# EAGLE board FlexOLED-v02 (EAGLE 7.7.0), part 1 of 2
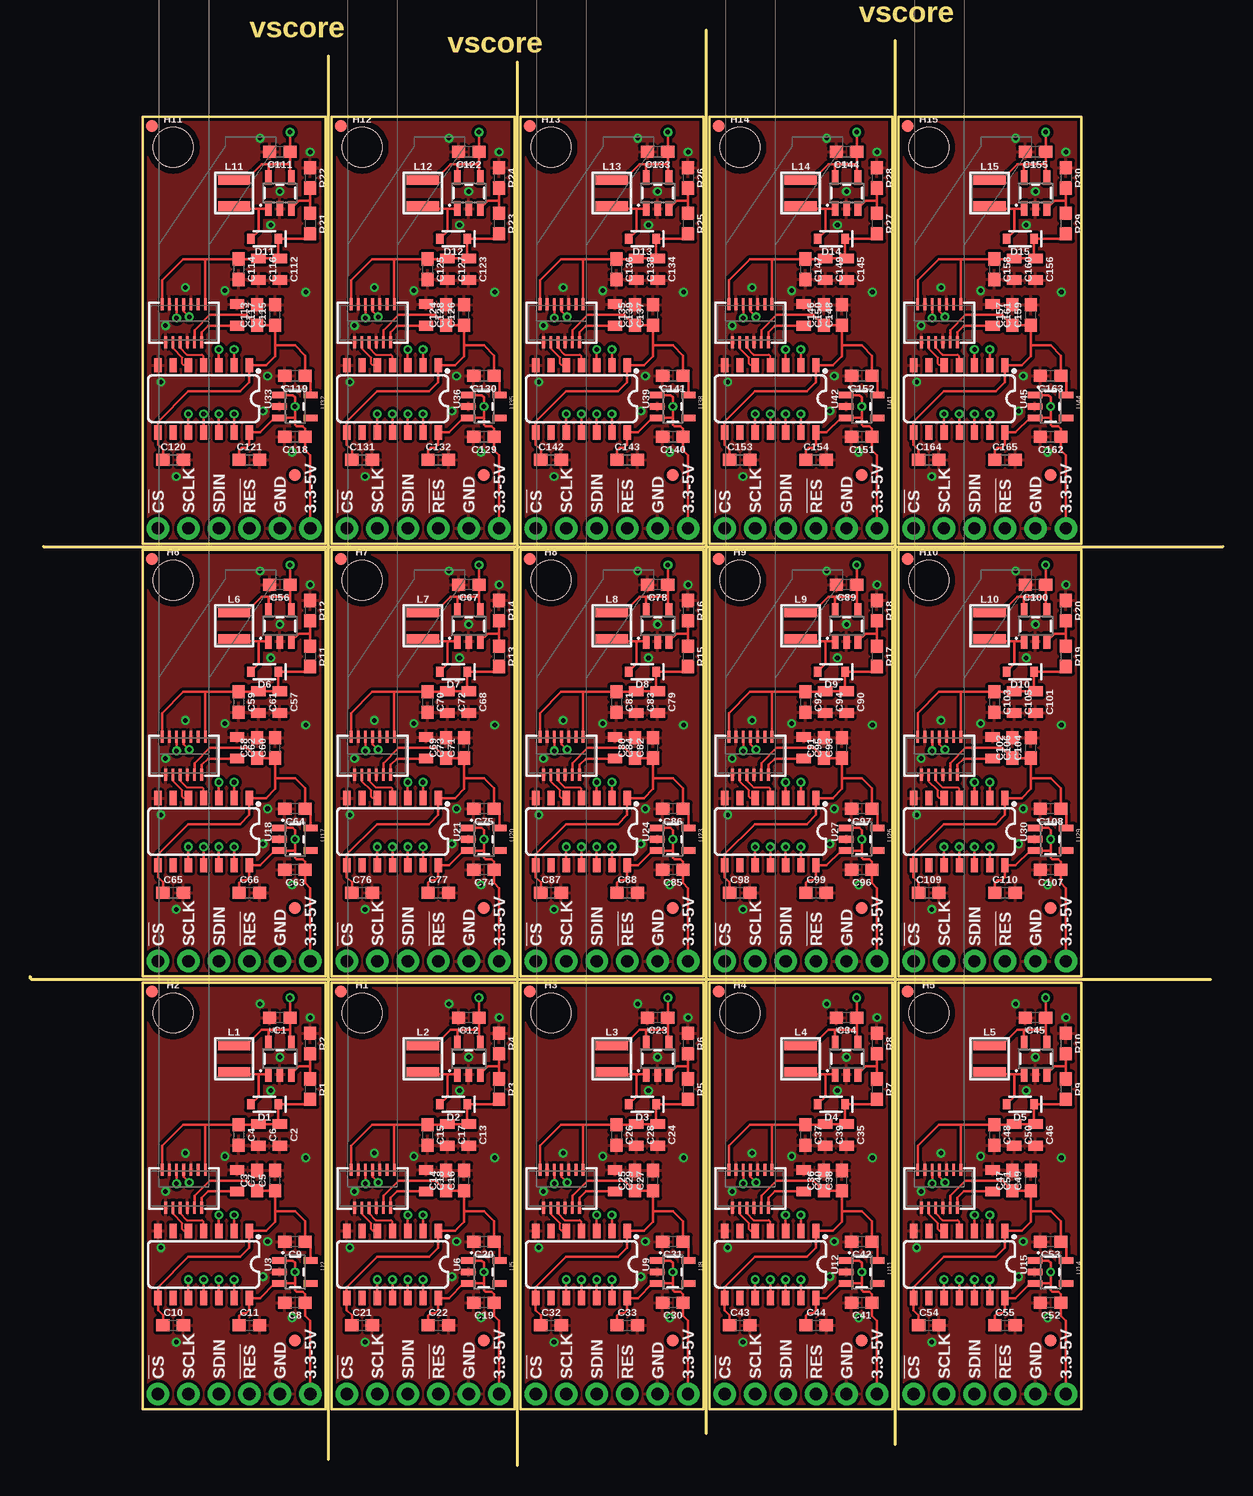
[diagram p0: board, top side]
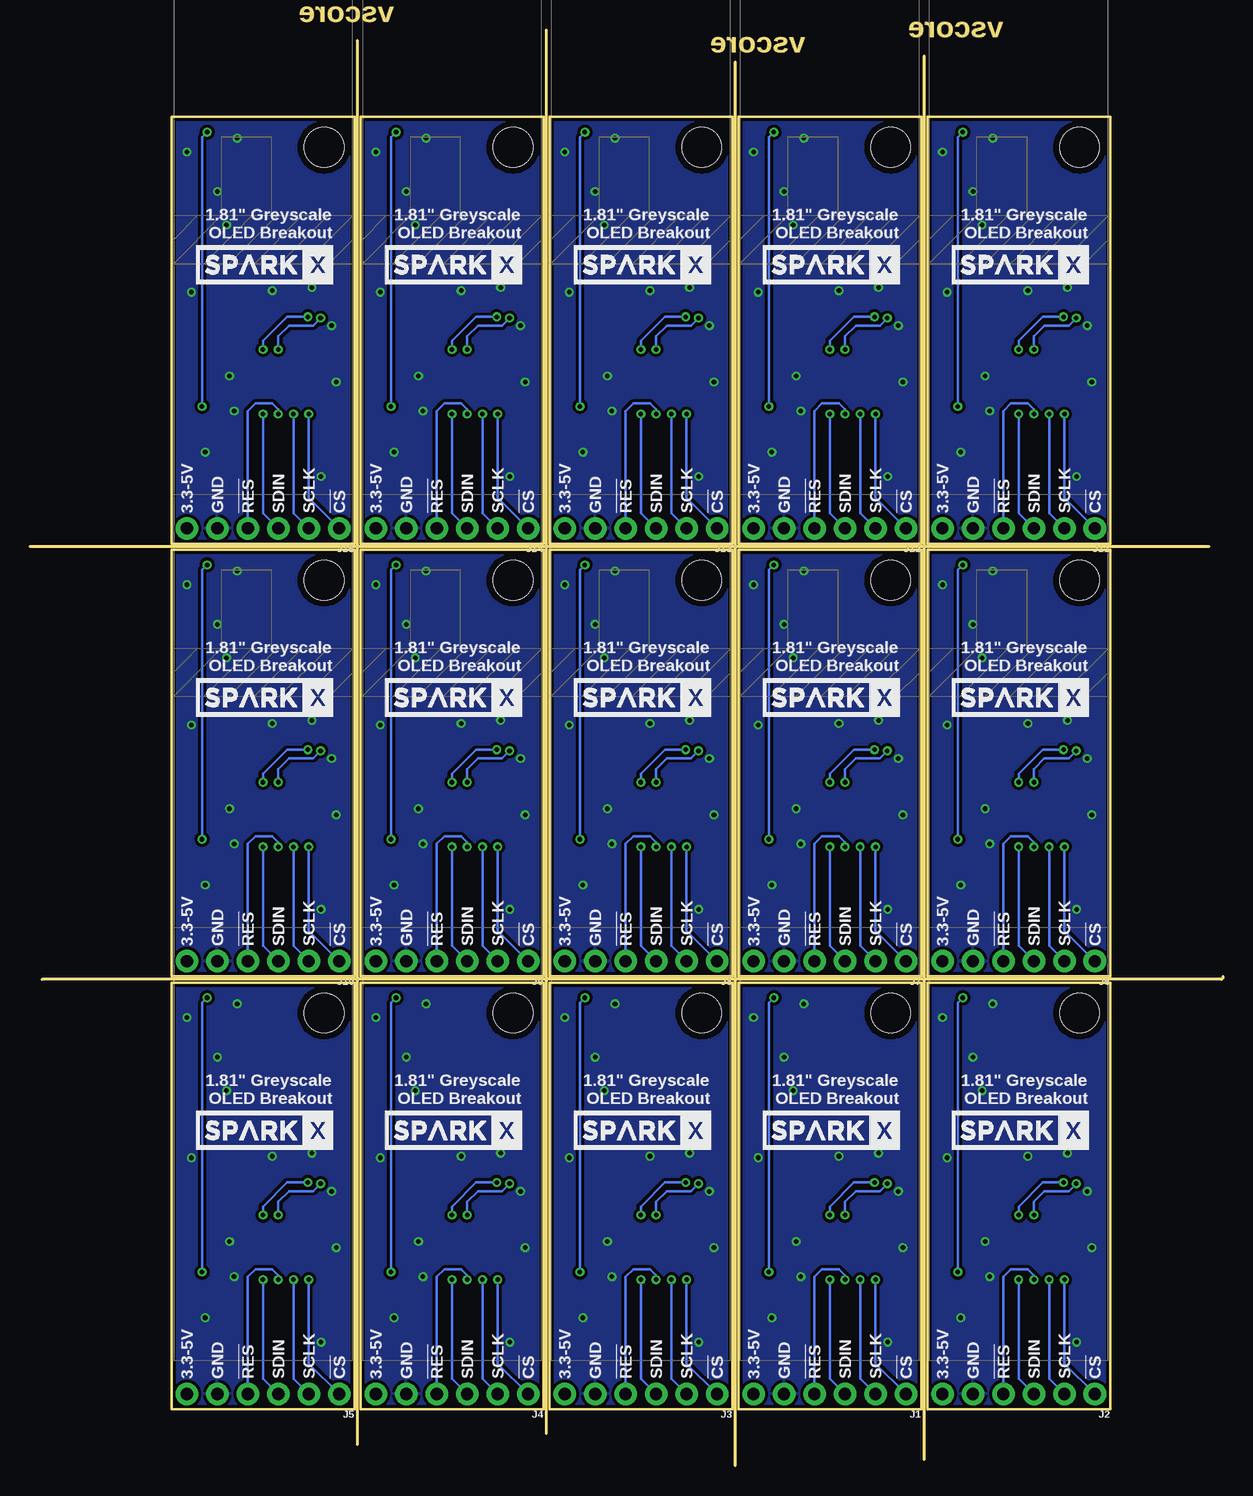
[diagram p1: board, bottom side, seen from below]

Size 99.44 x 119.63 mm. Coordinates in mm from the lower left corner, seen from the top.
Outline: 0,40.77 0,40.64 0.13,40.51 98.42,40.51
Outline: 72.14,1.78 72.14,118.75
Outline: 56.39,2.67 56.39,119.63
Outline: 40.64,0 40.64,116.97
Outline: 24.89,0.51 24.89,117.47
Outline: 1.14,76.58 99.44,76.58
Outline: 24.64,4.7 9.4,4.7 9.4,40.26 24.64,40.25 24.64,4.7
Outline: 40.39,4.7 25.15,4.7 25.15,40.26 40.39,40.25 40.39,4.7
Outline: 56.13,4.7 40.89,4.7 40.89,40.26 56.13,40.25 56.13,4.7
Outline: 71.88,4.7 56.64,4.7 56.64,40.26 71.88,40.25 71.88,4.7
Outline: 87.63,4.7 72.39,4.7 72.39,40.26 87.63,40.25 87.63,4.7
Outline: 24.64,40.77 9.4,40.77 9.4,76.33 24.64,76.32 24.64,40.77
Outline: 40.39,40.77 25.15,40.77 25.15,76.33 40.39,76.32 40.39,40.77
Outline: 56.13,40.77 40.89,40.77 40.89,76.33 56.13,76.32 56.13,40.77
Outline: 71.88,40.77 56.64,40.77 56.64,76.33 71.88,76.32 71.88,40.77
Outline: 87.63,40.77 72.39,40.77 72.39,76.33 87.63,76.32 87.63,40.77
Outline: 24.64,76.83 9.4,76.83 9.4,112.39 24.64,112.39 24.64,76.83
Outline: 40.39,76.83 25.15,76.83 25.15,112.39 40.39,112.39 40.39,76.83
Outline: 56.13,76.83 40.89,76.83 40.89,112.39 56.13,112.39 56.13,76.83
Outline: 71.88,76.83 56.64,76.83 56.64,112.39 71.88,112.39 71.88,76.83
Outline: 87.63,76.83 72.39,76.83 72.39,112.39 87.63,112.39 87.63,76.83
Copper layers (1*16): Top 0.035mm / dielectric 1.5mm / Bottom 0.035mm
Design rules "SparkFun-2-layer-TIGHT": minimum track width 7mil, minimum drill 15mil, track to track 7mil, track to pad 7mil, pad to pad 7mil, via to via 7mil, smd to smd 7mil, copper to edge 7mil, drill to drill 7mil, minimum pad ring 7mil, minimum via ring 7mil, stop-mask expansion 4mil, vias tented up to drill 25mil, thermal gap 10mil

## Footprints (pad centres in the part's own frame; a part is rotated, then mirrored left to right if it is on the bottom)
0603 = smd 1.1 x 1: 1 -0.85,0; 2 0.85,0
0805 = smd 0.8 x 1.2: 1 -0.9,0; 2 0.9,0
SOD-323 = smd 0.63 x 0.83: A 1.15,0; C -1.15,0
OEL_1.8_FPC_Y3B = smd 0.23 x 1 bottom: 1 6,-11.795; 2 5.7,-14.955; 3 5.4,-11.795; 4 5.1,-14.955; 5 4.8,-11.795; 6 4.5,-14.955; 7 4.2,-11.795; 8 3.9,-14.955; 9 3.6,-11.795; 10 3.3,-14.955; 11 3,-11.795; 12 2.7,-14.955; 13 2.4,-11.795
FIDUCIAL-1X2 = smd 1 x 1: 1 0,0
STAND-OFF = hole 3.302: 0,0
1X06_NO_SILK = drill 1.016 pad 1.88: 1 0,0; 2 2.54,0; 3 5.08,0; 4 7.62,0; 5 10.16,0; 6 12.7,0
INDUCTOR_3X3 = smd 2.7 x 0.8: P$1 0,1.1; P$2 0,-1.1
SOT23-5 = smd 0.55 x 1.2: 1 -0.95,-1.3; 2 0,-1.3; 3 0.95,-1.3; 4 0.95,1.3; 5 -0.95,1.3
SO14 = smd 0.6 x 1.2: 1 -3.81,-2.8; 2 -2.54,-2.8; 3 -1.27,-2.8; 4 0,-2.8; 5 1.27,-2.8; 6 2.54,-2.8; 7 3.81,-2.8; 8 3.81,2.8; 9 2.54,2.8; 10 1.27,2.8; 11 0,2.8; 12 -1.27,2.8; 13 -2.54,2.8; 14 -3.81,2.8

## Placement (x,y rotation side)
C1  1.0uF  [0603]  20.83,37.34 180 top
C2  1.0uF/25V  [0805]  20.83,27.56 270 top
C3  0.1uF  [0603]  18.92,23.75 90 top
C4  0.1uF/25V  [0603]  17.4,27.56 270 top
C5  1.0uF  [0603]  20.45,23.75 90 top
C6  2.2uF/25V  [0805]  19.05,27.56 270 top
C7  2.2uF/25V  [0805]  17.27,23.75 270 top
C8  1.0uF  [0603]  22.1,13.59 180 top
C9  2.2uF  [0603]  22.1,18.67 180 top
C10  0.1uF  [0603]  11.94,11.68 0 top
C11  0.1uF  [0603]  18.29,11.68 0 top
C12  1.0uF  [0603]  36.58,37.34 180 top
C13  1.0uF/25V  [0805]  36.58,27.56 270 top
C14  0.1uF  [0603]  34.67,23.75 90 top
C15  0.1uF/25V  [0603]  33.15,27.56 270 top
C16  1.0uF  [0603]  36.2,23.75 90 top
C17  2.2uF/25V  [0805]  34.8,27.56 270 top
C18  2.2uF/25V  [0805]  33.02,23.75 270 top
C19  1.0uF  [0603]  37.85,13.59 180 top
C20  2.2uF  [0603]  37.85,18.67 180 top
C21  0.1uF  [0603]  27.69,11.68 0 top
C22  0.1uF  [0603]  34.04,11.68 0 top
C23  1.0uF  [0603]  52.32,37.34 180 top
C24  1.0uF/25V  [0805]  52.32,27.56 270 top
C25  0.1uF  [0603]  50.42,23.75 90 top
C26  0.1uF/25V  [0603]  48.89,27.56 270 top
C27  1.0uF  [0603]  51.94,23.75 90 top
C28  2.2uF/25V  [0805]  50.55,27.56 270 top
C29  2.2uF/25V  [0805]  48.77,23.75 270 top
C30  1.0uF  [0603]  53.59,13.59 180 top
C31  2.2uF  [0603]  53.59,18.67 180 top
C32  0.1uF  [0603]  43.43,11.68 0 top
C33  0.1uF  [0603]  49.78,11.68 0 top
C34  1.0uF  [0603]  68.07,37.34 180 top
C35  1.0uF/25V  [0805]  68.07,27.56 270 top
C36  0.1uF  [0603]  66.17,23.75 90 top
C37  0.1uF/25V  [0603]  64.64,27.56 270 top
C38  1.0uF  [0603]  67.69,23.75 90 top
C39  2.2uF/25V  [0805]  66.29,27.56 270 top
C40  2.2uF/25V  [0805]  64.52,23.75 270 top
C41  1.0uF  [0603]  69.34,13.59 180 top
C42  2.2uF  [0603]  69.34,18.67 180 top
C43  0.1uF  [0603]  59.18,11.68 0 top
C44  0.1uF  [0603]  65.53,11.68 0 top
C45  1.0uF  [0603]  83.82,37.34 180 top
C46  1.0uF/25V  [0805]  83.82,27.56 270 top
C47  0.1uF  [0603]  81.91,23.75 90 top
C48  0.1uF/25V  [0603]  80.39,27.56 270 top
C49  1.0uF  [0603]  83.44,23.75 90 top
C50  2.2uF/25V  [0805]  82.04,27.56 270 top
C51  2.2uF/25V  [0805]  80.26,23.75 270 top
C52  1.0uF  [0603]  85.09,13.59 180 top
C53  2.2uF  [0603]  85.09,18.67 180 top
C54  0.1uF  [0603]  74.93,11.68 0 top
C55  0.1uF  [0603]  81.28,11.68 0 top
C56  1.0uF  [0603]  20.83,73.41 180 top
C57  1.0uF/25V  [0805]  20.83,63.63 270 top
C58  0.1uF  [0603]  18.92,59.82 90 top
C59  0.1uF/25V  [0603]  17.4,63.63 270 top
C60  1.0uF  [0603]  20.45,59.82 90 top
C61  2.2uF/25V  [0805]  19.05,63.63 270 top
C62  2.2uF/25V  [0805]  17.27,59.82 270 top
C63  1.0uF  [0603]  22.1,49.66 180 top
C64  2.2uF  [0603]  22.1,54.74 180 top
C65  0.1uF  [0603]  11.94,47.75 0 top
C66  0.1uF  [0603]  18.29,47.75 0 top
C67  1.0uF  [0603]  36.58,73.41 180 top
C68  1.0uF/25V  [0805]  36.58,63.63 270 top
C69  0.1uF  [0603]  34.67,59.82 90 top
C70  0.1uF/25V  [0603]  33.15,63.63 270 top
C71  1.0uF  [0603]  36.2,59.82 90 top
C72  2.2uF/25V  [0805]  34.8,63.63 270 top
C73  2.2uF/25V  [0805]  33.02,59.82 270 top
C74  1.0uF  [0603]  37.85,49.66 180 top
C75  2.2uF  [0603]  37.85,54.74 180 top
C76  0.1uF  [0603]  27.69,47.75 0 top
C77  0.1uF  [0603]  34.04,47.75 0 top
C78  1.0uF  [0603]  52.32,73.41 180 top
C79  1.0uF/25V  [0805]  52.32,63.63 270 top
C80  0.1uF  [0603]  50.42,59.82 90 top
C81  0.1uF/25V  [0603]  48.89,63.63 270 top
C82  1.0uF  [0603]  51.94,59.82 90 top
C83  2.2uF/25V  [0805]  50.55,63.63 270 top
C84  2.2uF/25V  [0805]  48.77,59.82 270 top
C85  1.0uF  [0603]  53.59,49.66 180 top
C86  2.2uF  [0603]  53.59,54.74 180 top
C87  0.1uF  [0603]  43.43,47.75 0 top
C88  0.1uF  [0603]  49.78,47.75 0 top
C89  1.0uF  [0603]  68.07,73.41 180 top
C90  1.0uF/25V  [0805]  68.07,63.63 270 top
C91  0.1uF  [0603]  66.17,59.82 90 top
C92  0.1uF/25V  [0603]  64.64,63.63 270 top
C93  1.0uF  [0603]  67.69,59.82 90 top
C94  2.2uF/25V  [0805]  66.29,63.63 270 top
C95  2.2uF/25V  [0805]  64.52,59.82 270 top
C96  1.0uF  [0603]  69.34,49.66 180 top
C97  2.2uF  [0603]  69.34,54.74 180 top
C98  0.1uF  [0603]  59.18,47.75 0 top
C99  0.1uF  [0603]  65.53,47.75 0 top
C100  1.0uF  [0603]  83.82,73.41 180 top
C101  1.0uF/25V  [0805]  83.82,63.63 270 top
C102  0.1uF  [0603]  81.91,59.82 90 top
C103  0.1uF/25V  [0603]  80.39,63.63 270 top
C104  1.0uF  [0603]  83.44,59.82 90 top
C105  2.2uF/25V  [0805]  82.04,63.63 270 top
C106  2.2uF/25V  [0805]  80.26,59.82 270 top
C107  1.0uF  [0603]  85.09,49.66 180 top
C108  2.2uF  [0603]  85.09,54.74 180 top
C109  0.1uF  [0603]  74.93,47.75 0 top
C110  0.1uF  [0603]  81.28,47.75 0 top
C111  1.0uF  [0603]  20.83,109.47 180 top
C112  1.0uF/25V  [0805]  20.83,99.69 270 top
C113  0.1uF  [0603]  18.92,95.89 90 top
C114  0.1uF/25V  [0603]  17.4,99.69 270 top
C115  1.0uF  [0603]  20.45,95.89 90 top
C116  2.2uF/25V  [0805]  19.05,99.69 270 top
C117  2.2uF/25V  [0805]  17.27,95.89 270 top
C118  1.0uF  [0603]  22.1,85.72 180 top
C119  2.2uF  [0603]  22.1,90.8 180 top
C120  0.1uF  [0603]  11.94,83.82 0 top
C121  0.1uF  [0603]  18.29,83.82 0 top
C122  1.0uF  [0603]  36.58,109.47 180 top
C123  1.0uF/25V  [0805]  36.58,99.69 270 top
C124  0.1uF  [0603]  34.67,95.89 90 top
C125  0.1uF/25V  [0603]  33.15,99.69 270 top
C126  1.0uF  [0603]  36.2,95.89 90 top
C127  2.2uF/25V  [0805]  34.8,99.69 270 top
C128  2.2uF/25V  [0805]  33.02,95.89 270 top
C129  1.0uF  [0603]  37.85,85.72 180 top
C130  2.2uF  [0603]  37.85,90.8 180 top
C131  0.1uF  [0603]  27.69,83.82 0 top
C132  0.1uF  [0603]  34.04,83.82 0 top
C133  1.0uF  [0603]  52.32,109.47 180 top
C134  1.0uF/25V  [0805]  52.32,99.69 270 top
C135  0.1uF  [0603]  50.42,95.89 90 top
C136  0.1uF/25V  [0603]  48.89,99.69 270 top
C137  1.0uF  [0603]  51.94,95.89 90 top
C138  2.2uF/25V  [0805]  50.55,99.69 270 top
C139  2.2uF/25V  [0805]  48.77,95.89 270 top
C140  1.0uF  [0603]  53.59,85.72 180 top
C141  2.2uF  [0603]  53.59,90.8 180 top
C142  0.1uF  [0603]  43.43,83.82 0 top
C143  0.1uF  [0603]  49.78,83.82 0 top
C144  1.0uF  [0603]  68.07,109.47 180 top
C145  1.0uF/25V  [0805]  68.07,99.69 270 top
C146  0.1uF  [0603]  66.17,95.89 90 top
C147  0.1uF/25V  [0603]  64.64,99.69 270 top
C148  1.0uF  [0603]  67.69,95.89 90 top
C149  2.2uF/25V  [0805]  66.29,99.69 270 top
C150  2.2uF/25V  [0805]  64.52,95.89 270 top
C151  1.0uF  [0603]  69.34,85.72 180 top
C152  2.2uF  [0603]  69.34,90.8 180 top
C153  0.1uF  [0603]  59.18,83.82 0 top
C154  0.1uF  [0603]  65.53,83.82 0 top
C155  1.0uF  [0603]  83.82,109.47 180 top
C156  1.0uF/25V  [0805]  83.82,99.69 270 top
C157  0.1uF  [0603]  81.91,95.89 90 top
C158  0.1uF/25V  [0603]  80.39,99.69 270 top
C159  1.0uF  [0603]  83.44,95.89 90 top
C160  2.2uF/25V  [0805]  82.04,99.69 270 top
C161  2.2uF/25V  [0805]  80.26,95.89 270 top
C162  1.0uF  [0603]  85.09,85.72 180 top
C163  2.2uF  [0603]  85.09,90.8 180 top
C164  0.1uF  [0603]  74.93,83.82 0 top
C165  0.1uF  [0603]  81.28,83.82 0 top
D1  1A/23V/620mV  [SOD-323]  19.56,30.1 180 top
D2  1A/23V/620mV  [SOD-323]  35.31,30.1 180 top
D3  1A/23V/620mV  [SOD-323]  51.05,30.1 180 top
D4  1A/23V/620mV  [SOD-323]  66.8,30.1 180 top
D5  1A/23V/620mV  [SOD-323]  82.55,30.1 180 top
D6  1A/23V/620mV  [SOD-323]  19.56,66.17 180 top
D7  1A/23V/620mV  [SOD-323]  35.31,66.17 180 top
D8  1A/23V/620mV  [SOD-323]  51.05,66.17 180 top
D9  1A/23V/620mV  [SOD-323]  66.8,66.17 180 top
D10  1A/23V/620mV  [SOD-323]  82.55,66.17 180 top
D11  1A/23V/620mV  [SOD-323]  19.56,102.23 180 top
D12  1A/23V/620mV  [SOD-323]  35.31,102.23 180 top
D13  1A/23V/620mV  [SOD-323]  51.05,102.23 180 top
D14  1A/23V/620mV  [SOD-323]  66.8,102.23 180 top
D15  1A/23V/620mV  [SOD-323]  82.55,102.23 180 top
DS1  OEL_1.8OEL_Y3B  [OEL_1.8_FPC_Y3B]  17.02,36.45 0 bottom
DS2  OEL_1.8OEL_Y3B  [OEL_1.8_FPC_Y3B]  32.77,36.45 0 bottom
DS3  OEL_1.8OEL_Y3B  [OEL_1.8_FPC_Y3B]  48.51,36.45 0 bottom
DS4  OEL_1.8OEL_Y3B  [OEL_1.8_FPC_Y3B]  64.26,36.45 0 bottom
DS5  OEL_1.8OEL_Y3B  [OEL_1.8_FPC_Y3B]  80.01,36.45 0 bottom
DS6  OEL_1.8OEL_Y3B  [OEL_1.8_FPC_Y3B]  17.02,72.52 0 bottom
DS7  OEL_1.8OEL_Y3B  [OEL_1.8_FPC_Y3B]  32.77,72.52 0 bottom
DS8  OEL_1.8OEL_Y3B  [OEL_1.8_FPC_Y3B]  48.51,72.52 0 bottom
DS9  OEL_1.8OEL_Y3B  [OEL_1.8_FPC_Y3B]  64.26,72.52 0 bottom
DS10  OEL_1.8OEL_Y3B  [OEL_1.8_FPC_Y3B]  80.01,72.52 0 bottom
DS11  OEL_1.8OEL_Y3B  [OEL_1.8_FPC_Y3B]  17.02,108.58 0 bottom
DS12  OEL_1.8OEL_Y3B  [OEL_1.8_FPC_Y3B]  32.77,108.58 0 bottom
DS13  OEL_1.8OEL_Y3B  [OEL_1.8_FPC_Y3B]  48.51,108.58 0 bottom
DS14  OEL_1.8OEL_Y3B  [OEL_1.8_FPC_Y3B]  64.26,108.58 0 bottom
DS15  OEL_1.8OEL_Y3B  [OEL_1.8_FPC_Y3B]  80.01,108.58 0 bottom
FD1  FIDUCIAL1X2  [FIDUCIAL-1X2]  22.1,10.41 0 top
FD2  FIDUCIAL1X2  [FIDUCIAL-1X2]  10.16,39.5 0 top
FD3  FIDUCIAL1X2  [FIDUCIAL-1X2]  37.85,10.41 0 top
FD4  FIDUCIAL1X2  [FIDUCIAL-1X2]  25.91,39.5 0 top
FD5  FIDUCIAL1X2  [FIDUCIAL-1X2]  53.59,10.41 0 top
FD6  FIDUCIAL1X2  [FIDUCIAL-1X2]  41.66,39.5 0 top
FD7  FIDUCIAL1X2  [FIDUCIAL-1X2]  69.34,10.41 0 top
FD8  FIDUCIAL1X2  [FIDUCIAL-1X2]  57.4,39.5 0 top
FD9  FIDUCIAL1X2  [FIDUCIAL-1X2]  85.09,10.41 0 top
FD10  FIDUCIAL1X2  [FIDUCIAL-1X2]  73.15,39.5 0 top
FD11  FIDUCIAL1X2  [FIDUCIAL-1X2]  22.1,46.48 0 top
FD12  FIDUCIAL1X2  [FIDUCIAL-1X2]  10.16,75.56 0 top
FD13  FIDUCIAL1X2  [FIDUCIAL-1X2]  37.85,46.48 0 top
FD14  FIDUCIAL1X2  [FIDUCIAL-1X2]  25.91,75.56 0 top
FD15  FIDUCIAL1X2  [FIDUCIAL-1X2]  53.59,46.48 0 top
FD16  FIDUCIAL1X2  [FIDUCIAL-1X2]  41.66,75.56 0 top
FD17  FIDUCIAL1X2  [FIDUCIAL-1X2]  69.34,46.48 0 top
FD18  FIDUCIAL1X2  [FIDUCIAL-1X2]  57.4,75.56 0 top
FD19  FIDUCIAL1X2  [FIDUCIAL-1X2]  85.09,46.48 0 top
FD20  FIDUCIAL1X2  [FIDUCIAL-1X2]  73.15,75.56 0 top
FD21  FIDUCIAL1X2  [FIDUCIAL-1X2]  22.1,82.55 0 top
FD22  FIDUCIAL1X2  [FIDUCIAL-1X2]  10.16,111.63 0 top
FD23  FIDUCIAL1X2  [FIDUCIAL-1X2]  37.85,82.55 0 top
FD24  FIDUCIAL1X2  [FIDUCIAL-1X2]  25.91,111.63 0 top
FD25  FIDUCIAL1X2  [FIDUCIAL-1X2]  53.59,82.55 0 top
FD26  FIDUCIAL1X2  [FIDUCIAL-1X2]  41.66,111.63 0 top
FD27  FIDUCIAL1X2  [FIDUCIAL-1X2]  69.34,82.55 0 top
FD28  FIDUCIAL1X2  [FIDUCIAL-1X2]  57.4,111.63 0 top
FD29  FIDUCIAL1X2  [FIDUCIAL-1X2]  85.09,82.55 0 top
FD30  FIDUCIAL1X2  [FIDUCIAL-1X2]  73.15,111.63 0 top
H1  STAND-OFF  [STAND-OFF]  27.69,37.72 0 top
H2  STAND-OFF  [STAND-OFF]  11.94,37.72 0 top
H3  STAND-OFF  [STAND-OFF]  43.43,37.72 0 top
H4  STAND-OFF  [STAND-OFF]  59.18,37.72 0 top
H5  STAND-OFF  [STAND-OFF]  74.93,37.72 0 top
H6  STAND-OFF  [STAND-OFF]  11.94,73.79 0 top
H7  STAND-OFF  [STAND-OFF]  27.69,73.79 0 top
H8  STAND-OFF  [STAND-OFF]  43.43,73.79 0 top
H9  STAND-OFF  [STAND-OFF]  59.18,73.79 0 top
H10  STAND-OFF  [STAND-OFF]  74.93,73.79 0 top
H11  STAND-OFF  [STAND-OFF]  11.94,109.86 0 top
H12  STAND-OFF  [STAND-OFF]  27.69,109.86 0 top
H13  STAND-OFF  [STAND-OFF]  43.43,109.86 0 top
H14  STAND-OFF  [STAND-OFF]  59.18,109.86 0 top
H15  STAND-OFF  [STAND-OFF]  74.93,109.86 0 top
J1  [1X06_NO_SILK]  26.42,5.97 180 bottom
J2  [1X06_NO_SILK]  10.67,5.97 180 bottom
J3  [1X06_NO_SILK]  42.16,5.97 180 bottom
J4  [1X06_NO_SILK]  57.91,5.97 180 bottom
J5  [1X06_NO_SILK]  73.66,5.97 180 bottom
J6  [1X06_NO_SILK]  10.67,42.04 180 bottom
J7  [1X06_NO_SILK]  26.42,42.04 180 bottom
J8  [1X06_NO_SILK]  42.16,42.04 180 bottom
J9  [1X06_NO_SILK]  57.91,42.04 180 bottom
J10  [1X06_NO_SILK]  73.66,42.04 180 bottom
J11  [1X06_NO_SILK]  10.67,78.11 180 bottom
J12  [1X06_NO_SILK]  26.42,78.11 180 bottom
J13  [1X06_NO_SILK]  42.16,78.11 180 bottom
J14  [1X06_NO_SILK]  57.91,78.11 180 bottom
J15  [1X06_NO_SILK]  73.66,78.11 180 bottom
L1  10uH  [INDUCTOR_3X3]  17.02,33.91 0 top
L2  10uH  [INDUCTOR_3X3]  32.77,33.91 0 top
L3  10uH  [INDUCTOR_3X3]  48.51,33.91 0 top
L4  10uH  [INDUCTOR_3X3]  64.26,33.91 0 top
L5  10uH  [INDUCTOR_3X3]  80.01,33.91 0 top
L6  10uH  [INDUCTOR_3X3]  17.02,69.98 0 top
L7  10uH  [INDUCTOR_3X3]  32.77,69.98 0 top
L8  10uH  [INDUCTOR_3X3]  48.51,69.98 0 top
L9  10uH  [INDUCTOR_3X3]  64.26,69.98 0 top
L10  10uH  [INDUCTOR_3X3]  80.01,69.98 0 top
L11  10uH  [INDUCTOR_3X3]  17.02,106.05 0 top
L12  10uH  [INDUCTOR_3X3]  32.77,106.05 0 top
L13  10uH  [INDUCTOR_3X3]  48.51,106.05 0 top
L14  10uH  [INDUCTOR_3X3]  64.26,106.05 0 top
L15  10uH  [INDUCTOR_3X3]  80.01,106.05 0 top
LOGO1  SPARKX-LOGO5  [SPARKX-LARGE]  16.89,27.94 0 bottom
LOGO2  SPARKX-LOGO5  [SPARKX-LARGE]  32.64,27.94 0 bottom
LOGO3  SPARKX-LOGO5  [SPARKX-LARGE]  48.39,27.94 0 bottom
LOGO4  SPARKX-LOGO5  [SPARKX-LARGE]  64.14,27.94 0 bottom
LOGO5  SPARKX-LOGO5  [SPARKX-LARGE]  79.88,27.94 0 bottom
LOGO6  SPARKX-LOGO5  [SPARKX-LARGE]  16.89,64.01 0 bottom
LOGO7  SPARKX-LOGO5  [SPARKX-LARGE]  32.64,64.01 0 bottom
LOGO8  SPARKX-LOGO5  [SPARKX-LARGE]  48.39,64.01 0 bottom
LOGO9  SPARKX-LOGO5  [SPARKX-LARGE]  64.14,64.01 0 bottom
LOGO10  SPARKX-LOGO5  [SPARKX-LARGE]  79.88,64.01 0 bottom
LOGO11  SPARKX-LOGO5  [SPARKX-LARGE]  16.89,100.08 0 bottom
LOGO12  SPARKX-LOGO5  [SPARKX-LARGE]  32.64,100.08 0 bottom
LOGO13  SPARKX-LOGO5  [SPARKX-LARGE]  48.39,100.08 0 bottom
LOGO14  SPARKX-LOGO5  [SPARKX-LARGE]  64.14,100.08 0 bottom
LOGO15  SPARKX-LOGO5  [SPARKX-LARGE]  79.88,100.08 0 bottom
R1  47k  [0603]  23.37,31.37 270 top
R2  5.6k  [0603]  23.37,35.18 270 top
R3  47k  [0603]  39.12,31.37 270 top
R4  5.6k  [0603]  39.12,35.18 270 top
R5  47k  [0603]  54.86,31.37 270 top
R6  5.6k  [0603]  54.86,35.18 270 top
R7  47k  [0603]  70.61,31.37 270 top
R8  5.6k  [0603]  70.61,35.18 270 top
R9  47k  [0603]  86.36,31.37 270 top
R10  5.6k  [0603]  86.36,35.18 270 top
R11  47k  [0603]  23.37,67.44 270 top
R12  5.6k  [0603]  23.37,71.25 270 top
R13  47k  [0603]  39.12,67.44 270 top
R14  5.6k  [0603]  39.12,71.25 270 top
R15  47k  [0603]  54.86,67.44 270 top
R16  5.6k  [0603]  54.86,71.25 270 top
R17  47k  [0603]  70.61,67.44 270 top
R18  5.6k  [0603]  70.61,71.25 270 top
R19  47k  [0603]  86.36,67.44 270 top
R20  5.6k  [0603]  86.36,71.25 270 top
R21  47k  [0603]  23.37,103.5 270 top
R22  5.6k  [0603]  23.37,107.31 270 top
R23  47k  [0603]  39.12,103.5 270 top
R24  5.6k  [0603]  39.12,107.31 270 top
R25  47k  [0603]  54.86,103.5 270 top
R26  5.6k  [0603]  54.86,107.31 270 top
R27  47k  [0603]  70.61,103.5 270 top
R28  5.6k  [0603]  70.61,107.31 270 top
R29  47k  [0603]  86.36,103.5 270 top
R30  5.6k  [0603]  86.36,107.31 270 top
U1  AP3012  [SOT23-5]  20.83,33.91 0 top
U2  3.3V  [SOT23-5]  22.1,16.13 270 top
U3  TXB0104  [SO14]  14.48,16.76 180 top
U4  AP3012  [SOT23-5]  36.58,33.91 0 top
U5  3.3V  [SOT23-5]  37.85,16.13 270 top
U6  TXB0104  [SO14]  30.23,16.76 180 top
U7  AP3012  [SOT23-5]  52.32,33.91 0 top
U8  3.3V  [SOT23-5]  53.59,16.13 270 top
U9  TXB0104  [SO14]  45.97,16.76 180 top
U10  AP3012  [SOT23-5]  68.07,33.91 0 top
U11  3.3V  [SOT23-5]  69.34,16.13 270 top
U12  TXB0104  [SO14]  61.72,16.76 180 top
U13  AP3012  [SOT23-5]  83.82,33.91 0 top
U14  3.3V  [SOT23-5]  85.09,16.13 270 top
U15  TXB0104  [SO14]  77.47,16.76 180 top
U16  AP3012  [SOT23-5]  20.83,69.98 0 top
U17  3.3V  [SOT23-5]  22.1,52.2 270 top
U18  TXB0104  [SO14]  14.48,52.83 180 top
U19  AP3012  [SOT23-5]  36.58,69.98 0 top
U20  3.3V  [SOT23-5]  37.85,52.2 270 top
U21  TXB0104  [SO14]  30.23,52.83 180 top
U22  AP3012  [SOT23-5]  52.32,69.98 0 top
U23  3.3V  [SOT23-5]  53.59,52.2 270 top
U24  TXB0104  [SO14]  45.97,52.83 180 top
U25  AP3012  [SOT23-5]  68.07,69.98 0 top
U26  3.3V  [SOT23-5]  69.34,52.2 270 top
U27  TXB0104  [SO14]  61.72,52.83 180 top
U28  AP3012  [SOT23-5]  83.82,69.98 0 top
U29  3.3V  [SOT23-5]  85.09,52.2 270 top
U30  TXB0104  [SO14]  77.47,52.83 180 top
U31  AP3012  [SOT23-5]  20.83,106.05 0 top
U32  3.3V  [SOT23-5]  22.1,88.27 270 top
U33  TXB0104  [SO14]  14.48,88.9 180 top
U34  AP3012  [SOT23-5]  36.58,106.05 0 top
U35  3.3V  [SOT23-5]  37.85,88.27 270 top
U36  TXB0104  [SO14]  30.23,88.9 180 top
U37  AP3012  [SOT23-5]  52.32,106.05 0 top
U38  3.3V  [SOT23-5]  53.59,88.27 270 top
U39  TXB0104  [SO14]  45.97,88.9 180 top
U40  AP3012  [SOT23-5]  68.07,106.05 0 top
U41  3.3V  [SOT23-5]  69.34,88.27 270 top
U42  TXB0104  [SO14]  61.72,88.9 180 top
U43  AP3012  [SOT23-5]  83.82,106.05 0 top
U44  3.3V  [SOT23-5]  85.09,88.27 270 top
U45  TXB0104  [SO14]  77.47,88.9 180 top

## Library data of the parts
C1 C5 C8 C12 C16 C19 C23 C27 C30 C34 C38 C41 C45 C49 C52 C56 C60 C63 C67 C71 C74 C78 C82 C85 C89 C93 C96 C100 C104 C107 C111 C115 C118 C122 C126 C129 C133 C137 C140 C144 C148 C151 C155 C159 C162 = SparkFun-Capacitors; PROD_ID: CAP-00868
C2 C13 C24 C35 C46 C57 C68 C79 C90 C101 C112 C123 C134 C145 C156 = SparkFun-Capacitors; PROD_ID: CAP-11625
C3 C4 C10 C11 C14 C15 C21 C22 C25 C26 C32 C33 C36 C37 C43 C44 C47 C48 C54 C55 C58 C59 C65 C66 C69 C70 C76 C77 C80 C81 C87 C88 C91 C92 C98 C99 C102 C103 C109 C110 C113 C114 C120 C121 C124 C125 C131 C132 C135 C136 C142 C143 C146 C147 C153 C154 C157 C158 C164 C165 = SparkFun-Capacitors; PROD_ID: CAP-00810
C6 C7 C17 C18 C28 C29 C39 C40 C50 C51 C61 C62 C72 C73 C83 C84 C94 C95 C105 C106 C116 C117 C127 C128 C138 C139 C149 C150 C160 C161 = SparkFun-Capacitors; PROD_ID: CAP-11624
C9 C20 C31 C42 C53 C64 C75 C86 C97 C108 C119 C130 C141 C152 C163 = SparkFun-Capacitors; PROD_ID: CAP-07888
D1-D15 = SparkFun-DiscreteSemi; PROD_ID: DIO-11623
DS1-DS15 L1-L15 LOGO1-LOGO15 U1 U4 U7 U10 U13 U16 U19 U22 U25 U28 U31 U34 U37 U40 U43 = 1.81_Greyscale_OLED_Breakout
FD1-FD30 = SparkFun-Aesthetics
H1-H15 = SparkFun-Hardware
J1-J15 = SparkFun-Connectors
R1 R3 R5 R7 R9 R11 R13 R15 R17 R19 R21 R23 R25 R27 R29 = SparkFun-Resistors; PROD_ID: RES-07871
R2 R4 R6 R8 R10 R12 R14 R16 R18 R20 R22 R24 R26 R28 R30 = SparkFun-Resistors; PROD_ID: RES-12378
U2 U5 U8 U11 U14 U17 U20 U23 U26 U29 U32 U35 U38 U41 U44 = SparkFun-IC-Power; PROD_ID: VREG-12457
U3 U6 U9 U12 U15 U18 U21 U24 U27 U30 U33 U36 U39 U42 U45 = SparkFun-IC-Comms; PROD_ID: IC-11329

## Nets
3.3V: C3.1 C5.1 C9.1 C10.1 DS1.10 U2.5 U3.1 U3.8
3.3V1: C14.1 C16.1 C20.1 C21.1 DS2.10 U5.5 U6.1 U6.8
3.3V2: C25.1 C27.1 C31.1 C32.1 DS3.10 U8.5 U9.1 U9.8
3.3V3: C36.1 C38.1 C42.1 C43.1 DS4.10 U11.5 U12.1 U12.8
3.3V4: C47.1 C49.1 C53.1 C54.1 DS5.10 U14.5 U15.1 U15.8
3.3V5: C58.1 C60.1 C64.1 C65.1 DS6.10 U17.5 U18.1 U18.8
3.3V6: C69.1 C71.1 C75.1 C76.1 DS7.10 U20.5 U21.1 U21.8
3.3V7: C80.1 C82.1 C86.1 C87.1 DS8.10 U23.5 U24.1 U24.8
3.3V8: C91.1 C93.1 C97.1 C98.1 DS9.10 U26.5 U27.1 U27.8
3.3V9: C102.1 C104.1 C108.1 C109.1 DS10.10 U29.5 U30.1 U30.8
3.3V10: C113.1 C115.1 C119.1 C120.1 DS11.10 U32.5 U33.1 U33.8
3.3V11: C124.1 C126.1 C130.1 C131.1 DS12.10 U35.5 U36.1 U36.8
3.3V12: C135.1 C137.1 C141.1 C142.1 DS13.10 U38.5 U39.1 U39.8
3.3V13: C146.1 C148.1 C152.1 C153.1 DS14.10 U41.5 U42.1 U42.8
3.3V14: C157.1 C159.1 C163.1 C164.1 DS15.10 U44.5 U45.1 U45.8
12V: C2.1 C4.1 C6.1 D1.C DS1.1 DS1.13 R1.2
12V1: C13.1 C15.1 C17.1 D2.C DS2.1 DS2.13 R3.2
12V2: C24.1 C26.1 C28.1 D3.C DS3.1 DS3.13 R5.2
12V3: C35.1 C37.1 C39.1 D4.C DS4.1 DS4.13 R7.2
12V4: C46.1 C48.1 C50.1 D5.C DS5.1 DS5.13 R9.2
12V5: C57.1 C59.1 C61.1 D6.C DS6.1 DS6.13 R11.2
12V6: C68.1 C70.1 C72.1 D7.C DS7.1 DS7.13 R13.2
12V7: C79.1 C81.1 C83.1 D8.C DS8.1 DS8.13 R15.2
12V8: C90.1 C92.1 C94.1 D9.C DS9.1 DS9.13 R17.2
12V9: C101.1 C103.1 C105.1 D10.C DS10.1 DS10.13 R19.2
12V10: C112.1 C114.1 C116.1 D11.C DS11.1 DS11.13 R21.2
12V11: C123.1 C125.1 C127.1 D12.C DS12.1 DS12.13 R23.2
12V12: C134.1 C136.1 C138.1 D13.C DS13.1 DS13.13 R25.2
12V13: C145.1 C147.1 C149.1 D14.C DS14.1 DS14.13 R27.2
12V14: C156.1 C158.1 C160.1 D15.C DS15.1 DS15.13 R29.2
!CS!: DS1.4 U3.5
!CS!1: DS2.4 U6.5
!CS!2: DS3.4 U9.5
!CS!3: DS4.4 U12.5
!CS!4: DS5.4 U15.5
!CS!5: DS6.4 U18.5
!CS!6: DS7.4 U21.5
!CS!7: DS8.4 U24.5
!CS!8: DS9.4 U27.5
!CS!9: DS10.4 U30.5
!CS!10: DS11.4 U33.5
!CS!11: DS12.4 U36.5
!CS!12: DS13.4 U39.5
!CS!13: DS14.4 U42.5
!CS!14: DS15.4 U45.5
!CS!_HIGH: J2.1 U3.10
!CS!_HIGH1: J1.1 U6.10
!CS!_HIGH2: J3.1 U9.10
!CS!_HIGH3: J4.1 U12.10
!CS!_HIGH4: J5.1 U15.10
!CS!_HIGH5: J6.1 U18.10
!CS!_HIGH6: J7.1 U21.10
!CS!_HIGH7: J8.1 U24.10
!CS!_HIGH8: J9.1 U27.10
!CS!_HIGH9: J10.1 U30.10
!CS!_HIGH10: J11.1 U33.10
!CS!_HIGH11: J12.1 U36.10
!CS!_HIGH12: J13.1 U39.10
!CS!_HIGH13: J14.1 U42.10
!CS!_HIGH14: J15.1 U45.10
!RES!: DS1.5 U3.3
!RES!1: DS2.5 U6.3
!RES!2: DS3.5 U9.3
!RES!3: DS4.5 U12.3
!RES!4: DS5.5 U15.3
!RES!5: DS6.5 U18.3
!RES!6: DS7.5 U21.3
!RES!7: DS8.5 U24.3
!RES!8: DS9.5 U27.3
!RES!9: DS10.5 U30.3
!RES!10: DS11.5 U33.3
!RES!11: DS12.5 U36.3
!RES!12: DS13.5 U39.3
!RES!13: DS14.5 U42.3
!RES!14: DS15.5 U45.3
!RES!_HIGH: J2.4 U3.12
!RES!_HIGH1: J1.4 U6.12
!RES!_HIGH2: J3.4 U9.12
!RES!_HIGH3: J4.4 U12.12
!RES!_HIGH4: J5.4 U15.12
!RES!_HIGH5: J6.4 U18.12
!RES!_HIGH6: J7.4 U21.12
!RES!_HIGH7: J8.4 U24.12
!RES!_HIGH8: J9.4 U27.12
!RES!_HIGH9: J10.4 U30.12
!RES!_HIGH10: J11.4 U33.12
!RES!_HIGH11: J12.4 U36.12
!RES!_HIGH12: J13.4 U39.12
!RES!_HIGH13: J14.4 U42.12
!RES!_HIGH14: J15.4 U45.12
GND: C1.2 C2.2 C3.2 C4.2 C5.2 C6.2 C7.1 C8.2 C9.2 C10.2 C11.2 DS1.2 DS1.3 DS1.8 DS1.9 J2.5 R2.1 U1.2 U2.2 U3.7
GND1: C12.2 C13.2 C14.2 C15.2 C16.2 C17.2 C18.1 C19.2 C20.2 C21.2 C22.2 DS2.2 DS2.3 DS2.8 DS2.9 J1.5 R4.1 U4.2 U5.2 U6.7
GND2: C23.2 C24.2 C25.2 C26.2 C27.2 C28.2 C29.1 C30.2 C31.2 C32.2 C33.2 DS3.2 DS3.3 DS3.8 DS3.9 J3.5 R6.1 U7.2 U8.2 U9.7
GND3: C34.2 C35.2 C36.2 C37.2 C38.2 C39.2 C40.1 C41.2 C42.2 C43.2 C44.2 DS4.2 DS4.3 DS4.8 DS4.9 J4.5 R8.1 U10.2 U11.2 U12.7
GND4: C45.2 C46.2 C47.2 C48.2 C49.2 C50.2 C51.1 C52.2 C53.2 C54.2 C55.2 DS5.2 DS5.3 DS5.8 DS5.9 J5.5 R10.1 U13.2 U14.2 U15.7
GND5: C56.2 C57.2 C58.2 C59.2 C60.2 C61.2 C62.1 C63.2 C64.2 C65.2 C66.2 DS6.2 DS6.3 DS6.8 DS6.9 J6.5 R12.1 U16.2 U17.2 U18.7
GND6: C67.2 C68.2 C69.2 C70.2 C71.2 C72.2 C73.1 C74.2 C75.2 C76.2 C77.2 DS7.2 DS7.3 DS7.8 DS7.9 J7.5 R14.1 U19.2 U20.2 U21.7
GND7: C78.2 C79.2 C80.2 C81.2 C82.2 C83.2 C84.1 C85.2 C86.2 C87.2 C88.2 DS8.2 DS8.3 DS8.8 DS8.9 J8.5 R16.1 U22.2 U23.2 U24.7
GND8: C89.2 C90.2 C91.2 C92.2 C93.2 C94.2 C95.1 C96.2 C97.2 C98.2 C99.2 DS9.2 DS9.3 DS9.8 DS9.9 J9.5 R18.1 U25.2 U26.2 U27.7
GND9: C100.2 C101.2 C102.2 C103.2 C104.2 C105.2 C106.1 C107.2 C108.2 C109.2 C110.2 DS10.2 DS10.3 DS10.8 DS10.9 J10.5 R20.1 U28.2 U29.2 U30.7
GND10: C111.2 C112.2 C113.2 C114.2 C115.2 C116.2 C117.1 C118.2 C119.2 C120.2 C121.2 DS11.2 DS11.3 DS11.8 DS11.9 J11.5 R22.1 U31.2 U32.2 U33.7
GND12: C122.2 C123.2 C124.2 C125.2 C126.2 C127.2 C128.1 C129.2 C130.2 C131.2 C132.2 DS12.2 DS12.3 DS12.8 DS12.9 J12.5 R24.1 U34.2 U35.2 U36.7
GND13: C133.2 C134.2 C135.2 C136.2 C137.2 C138.2 C139.1 C140.2 C141.2 C142.2 C143.2 DS13.2 DS13.3 DS13.8 DS13.9 J13.5 R26.1 U37.2 U38.2 U39.7
GND14: C144.2 C145.2 C146.2 C147.2 C148.2 C149.2 C150.1 C151.2 C152.2 C153.2 C154.2 DS14.2 DS14.3 DS14.8 DS14.9 J14.5 R28.1 U40.2 U41.2 U42.7
GND15: C155.2 C156.2 C157.2 C158.2 C159.2 C160.2 C161.1 C162.2 C163.2 C164.2 C165.2 DS15.2 DS15.3 DS15.8 DS15.9 J15.5 R30.1 U43.2 U44.2 U45.7
N$1: C7.2 DS1.12
N$2: D1.A L1.P$2 U1.1
N$3: R1.1 R2.2 U1.3
N$4: D2.A L2.P$2 U4.1
N$5: R3.1 R4.2 U4.3
N$6: C18.2 DS2.12
N$7: D3.A L3.P$2 U7.1
N$8: R5.1 R6.2 U7.3
N$9: C29.2 DS3.12
N$10: D4.A L4.P$2 U10.1
N$11: R7.1 R8.2 U10.3
N$12: C40.2 DS4.12
N$13: D5.A L5.P$2 U13.1
N$14: R9.1 R10.2 U13.3
N$15: C51.2 DS5.12
N$16: D6.A L6.P$2 U16.1
N$17: R11.1 R12.2 U16.3
N$18: C62.2 DS6.12
N$19: D7.A L7.P$2 U19.1
N$20: R13.1 R14.2 U19.3
N$21: C73.2 DS7.12
N$22: D8.A L8.P$2 U22.1
N$23: R15.1 R16.2 U22.3
N$24: C84.2 DS8.12
N$25: D9.A L9.P$2 U25.1
N$26: R17.1 R18.2 U25.3
N$27: C95.2 DS9.12
N$28: D10.A L10.P$2 U28.1
N$29: R19.1 R20.2 U28.3
N$30: C106.2 DS10.12
N$31: D11.A L11.P$2 U31.1
N$32: R21.1 R22.2 U31.3
N$33: C117.2 DS11.12
N$34: D12.A L12.P$2 U34.1
N$35: R23.1 R24.2 U34.3
N$36: C128.2 DS12.12
N$37: D13.A L13.P$2 U37.1
N$38: R25.1 R26.2 U37.3
N$39: C139.2 DS13.12
N$40: D14.A L14.P$2 U40.1
N$41: R27.1 R28.2 U40.3
N$42: C150.2 DS14.12
N$43: D15.A L15.P$2 U43.1
N$44: R29.1 R30.2 U43.3
N$45: C161.2 DS15.12
SCLK: DS1.6 U3.4
SCLK1: DS2.6 U6.4
SCLK2: DS3.6 U9.4
SCLK3: DS4.6 U12.4
SCLK4: DS5.6 U15.4
SCLK5: DS6.6 U18.4
SCLK6: DS7.6 U21.4
SCLK7: DS8.6 U24.4
SCLK8: DS9.6 U27.4
SCLK9: DS10.6 U30.4
SCLK10: DS11.6 U33.4
SCLK11: DS12.6 U36.4
SCLK12: DS13.6 U39.4
SCLK13: DS14.6 U42.4
SCLK14: DS15.6 U45.4
SCLK_HIGH: J2.2 U3.11
SCLK_HIGH1: J1.2 U6.11
SCLK_HIGH2: J3.2 U9.11
SCLK_HIGH3: J4.2 U12.11
SCLK_HIGH4: J5.2 U15.11
SCLK_HIGH5: J6.2 U18.11
SCLK_HIGH6: J7.2 U21.11
SCLK_HIGH7: J8.2 U24.11
SCLK_HIGH8: J9.2 U27.11
SCLK_HIGH9: J10.2 U30.11
SCLK_HIGH10: J11.2 U33.11
SCLK_HIGH11: J12.2 U36.11
SCLK_HIGH12: J13.2 U39.11
SCLK_HIGH13: J14.2 U42.11
SCLK_HIGH14: J15.2 U45.11
SDIN: DS1.7 U3.2
SDIN1: DS2.7 U6.2
SDIN2: DS3.7 U9.2
SDIN3: DS4.7 U12.2
SDIN4: DS5.7 U15.2
SDIN5: DS6.7 U18.2
SDIN6: DS7.7 U21.2
SDIN7: DS8.7 U24.2
SDIN8: DS9.7 U27.2
SDIN9: DS10.7 U30.2
SDIN10: DS11.7 U33.2
SDIN11: DS12.7 U36.2
SDIN12: DS13.7 U39.2
SDIN13: DS14.7 U42.2
SDIN14: DS15.7 U45.2
SDIN_HIGH: J2.3 U3.13
SDIN_HIGH1: J1.3 U6.13
SDIN_HIGH2: J3.3 U9.13
SDIN_HIGH3: J4.3 U12.13
SDIN_HIGH4: J5.3 U15.13
SDIN_HIGH5: J6.3 U18.13
SDIN_HIGH6: J7.3 U21.13
SDIN_HIGH7: J8.3 U24.13
SDIN_HIGH8: J9.3 U27.13
SDIN_HIGH9: J10.3 U30.13
SDIN_HIGH10: J11.3 U33.13
SDIN_HIGH11: J12.3 U36.13
SDIN_HIGH12: J13.3 U39.13
SDIN_HIGH13: J14.3 U42.13
SDIN_HIGH14: J15.3 U45.13
VIN: C1.1 C8.1 C11.1 J2.6 L1.P$1 U1.4 U1.5 U2.1 U2.3 U3.14
VIN1: C12.1 C19.1 C22.1 J1.6 L2.P$1 U4.4 U4.5 U5.1 U5.3 U6.14
VIN2: C23.1 C30.1 C33.1 J3.6 L3.P$1 U7.4 U7.5 U8.1 U8.3 U9.14
VIN3: C34.1 C41.1 C44.1 J4.6 L4.P$1 U10.4 U10.5 U11.1 U11.3 U12.14
VIN4: C45.1 C52.1 C55.1 J5.6 L5.P$1 U13.4 U13.5 U14.1 U14.3 U15.14
VIN5: C56.1 C63.1 C66.1 J6.6 L6.P$1 U16.4 U16.5 U17.1 U17.3 U18.14
VIN6: C67.1 C74.1 C77.1 J7.6 L7.P$1 U19.4 U19.5 U20.1 U20.3 U21.14
VIN7: C78.1 C85.1 C88.1 J8.6 L8.P$1 U22.4 U22.5 U23.1 U23.3 U24.14
VIN8: C89.1 C96.1 C99.1 J9.6 L9.P$1 U25.4 U25.5 U26.1 U26.3 U27.14
VIN9: C100.1 C107.1 C110.1 J10.6 L10.P$1 U28.4 U28.5 U29.1 U29.3 U30.14
VIN10: C111.1 C118.1 C121.1 J11.6 L11.P$1 U31.4 U31.5 U32.1 U32.3 U33.14
VIN11: C122.1 C129.1 C132.1 J12.6 L12.P$1 U34.4 U34.5 U35.1 U35.3 U36.14
VIN12: C133.1 C140.1 C143.1 J13.6 L13.P$1 U37.4 U37.5 U38.1 U38.3 U39.14
VIN13: C144.1 C151.1 C154.1 J14.6 L14.P$1 U40.4 U40.5 U41.1 U41.3 U42.14
VIN14: C155.1 C162.1 C165.1 J15.6 L15.P$1 U43.4 U43.5 U44.1 U44.3 U45.14